# Altium PCB P003_LED_Strip.PcbDoc (part 2 of 2)
Units mil, origin at the board's own origin, x right, y up, seen from the top; angles counter-clockwise.
Board outline 19680 x 580 mil, 2 copper layers (Top Layer, Bottom Layer), stack 61.6 mil thick; 160 components, 143 nets, 416 pads, 60 vias.
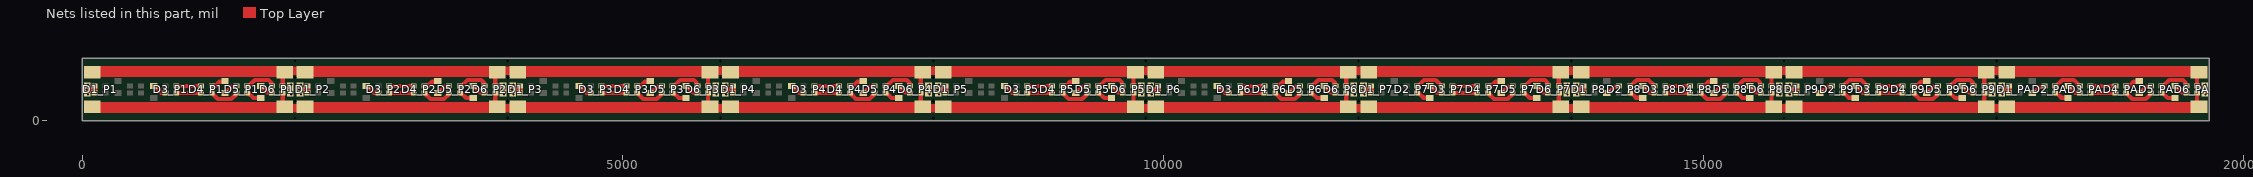
[diagram p2: the nets of this part, all layers, seen from the top]

## Via types
v1: diameter 34, hole 20, Top Layer to Bottom Layer, tented both sides, 60 vias

## Nets (pads, with @x,y where several pads share a name; then routed paths per layer and width w, separated by ;. In a path a pad name is that pad's centre, name@x,y a point inside that pad or via, vN(x,y) a via of type N, cw(c..) or ccw(c..) an arc to the next point about the centre after c; other vN are vias at no path point) (continued)
NetD2_P7_C1: D2_P7.C1 D3_P7.A1 | length 277.4
  Top Layer w40: D2_P7.C1@12349.5,322 12353.5,326 12362,326 12414,378 12522.5,378 12571,329.5 12571,326 12575,322 D3_P7.A1@12578.5,322
NetD2_P7_C2: D2_P7.C2 R3_P7.2 | length 140.9
  Top Layer w40: D2_P7.C2@12349.5,258 12353.5,254 12367,254 12406.07,214.93 12457.07,214.93 R3_P7.2@12468,204
NetD2_P8_A1: D2_P8.A1 R1_P8.1 | length 139.5
  Top Layer w40: R1_P8.1@14106,264 14126,264 14180,318 14217.5,318 D2_P8.A1@14221.5,322
NetD2_P8_C1: D2_P8.C1 D3_P8.A1 | length 277.4
  Top Layer w40: D2_P8.C1@14317.5,322 14321.5,326 14330,326 14382,378 14490.5,378 14539,329.5 14539,326 14543,322 D3_P8.A1@14546.5,322
NetD2_P8_C2: D2_P8.C2 R3_P8.2 | length 140.9
  Top Layer w40: D2_P8.C2@14317.5,258 14321.5,254 14335,254 14374.07,214.93 14425.07,214.93 R3_P8.2@14436,204
NetD2_P9_A1: D2_P9.A1 R1_P9.1 | length 139.5
  Top Layer w40: R1_P9.1@16074,264 16094,264 16148,318 16185.5,318 D2_P9.A1@16189.5,322
NetD2_P9_C1: D2_P9.C1 D3_P9.A1 | length 277.4
  Top Layer w40: D2_P9.C1@16285.5,322 16289.5,326 16298,326 16350,378 16458.5,378 16507,329.5 16507,326 16511,322 D3_P9.A1@16514.5,322
NetD2_P9_C2: D2_P9.C2 R3_P9.2 | length 140.9
  Top Layer w40: D2_P9.C2@16285.5,258 16289.5,254 16303,254 16342.07,214.93 16393.07,214.93 R3_P9.2@16404,204
NetD2_PA_A1: D2_PA.A1 R1_PA.1 | length 139.5
  Top Layer w40: R1_PA.1@18042,264 18062,264 18116,318 18153.5,318 D2_PA.A1@18157.5,322
NetD2_PA_C1: D2_PA.C1 D3_PA.A1 | length 277.4
  Top Layer w40: D2_PA.C1@18253.5,322 18257.5,326 18266,326 18318,378 18426.5,378 18475,329.5 18475,326 18479,322 D3_PA.A1@18482.5,322
NetD2_PA_C2: D2_PA.C2 R3_PA.2 | length 140.9
  Top Layer w40: D2_PA.C2@18253.5,258 18257.5,254 18271,254 18310.07,214.93 18361.07,214.93 R3_PA.2@18372,204
NetD3_P1_A2: D3_P1.A2 R3_P1.1 | length 120.5
  Top Layer w40: R3_P1.1@674,316 728.93,261.07 767.43,261.07 D3_P1.A2@770.5,258
NetD3_P1_C1: D3_P1.C1 D4_P1.A1 | length 229
  Top Layer w40: D3_P1.C1@869.5,322 D4_P1.A1@1098.5,322
NetD3_P1_C2: D3_P1.C2 D4_P1.A2 | length 229
  Top Layer w40: D3_P1.C2@869.5,258 D4_P1.A2@1098.5,258
NetD3_P2_A2: D3_P2.A2 R3_P2.1 | length 120.5
  Top Layer w40: R3_P2.1@2642,316 2696.93,261.07 2735.43,261.07 D3_P2.A2@2738.5,258
NetD3_P2_C1: D3_P2.C1 D4_P2.A1 | length 229
  Top Layer w40: D3_P2.C1@2837.5,322 D4_P2.A1@3066.5,322
NetD3_P2_C2: D3_P2.C2 D4_P2.A2 | length 229
  Top Layer w40: D3_P2.C2@2837.5,258 D4_P2.A2@3066.5,258
NetD3_P3_A2: D3_P3.A2 R3_P3.1 | length 120.5
  Top Layer w40: R3_P3.1@4610,316 4664.93,261.07 4703.43,261.07 D3_P3.A2@4706.5,258
NetD3_P3_C1: D3_P3.C1 D4_P3.A1 | length 229
  Top Layer w40: D3_P3.C1@4805.5,322 D4_P3.A1@5034.5,322
NetD3_P3_C2: D3_P3.C2 D4_P3.A2 | length 229
  Top Layer w40: D3_P3.C2@4805.5,258 D4_P3.A2@5034.5,258
NetD3_P4_A2: D3_P4.A2 R3_P4.1 | length 120.5
  Top Layer w40: R3_P4.1@6578,316 6632.93,261.07 6671.43,261.07 D3_P4.A2@6674.5,258
NetD3_P4_C1: D3_P4.C1 D4_P4.A1 | length 229
  Top Layer w40: D3_P4.C1@6773.5,322 D4_P4.A1@7002.5,322
NetD3_P4_C2: D3_P4.C2 D4_P4.A2 | length 229
  Top Layer w40: D3_P4.C2@6773.5,258 D4_P4.A2@7002.5,258
NetD3_P5_A2: D3_P5.A2 R3_P5.1 | length 120.5
  Top Layer w40: R3_P5.1@8546,316 8600.93,261.07 8639.43,261.07 D3_P5.A2@8642.5,258
NetD3_P5_C1: D3_P5.C1 D4_P5.A1 | length 229
  Top Layer w40: D3_P5.C1@8741.5,322 D4_P5.A1@8970.5,322
NetD3_P5_C2: D3_P5.C2 D4_P5.A2 | length 229
  Top Layer w40: D3_P5.C2@8741.5,258 D4_P5.A2@8970.5,258
NetD3_P6_A2: D3_P6.A2 R3_P6.1 | length 120.5
  Top Layer w40: R3_P6.1@10514,316 10568.93,261.07 10607.43,261.07 D3_P6.A2@10610.5,258
NetD3_P6_C1: D3_P6.C1 D4_P6.A1 | length 229
  Top Layer w40: D3_P6.C1@10709.5,322 D4_P6.A1@10938.5,322
NetD3_P6_C2: D3_P6.C2 D4_P6.A2 | length 229
  Top Layer w40: D3_P6.C2@10709.5,258 D4_P6.A2@10938.5,258
NetD3_P7_A2: D3_P7.A2 R3_P7.1 | length 120.5
  Top Layer w40: R3_P7.1@12482,316 12536.93,261.07 12575.43,261.07 D3_P7.A2@12578.5,258
NetD3_P7_C1: D3_P7.C1 D4_P7.A1 | length 229
  Top Layer w40: D3_P7.C1@12677.5,322 D4_P7.A1@12906.5,322
NetD3_P7_C2: D3_P7.C2 D4_P7.A2 | length 229
  Top Layer w40: D3_P7.C2@12677.5,258 D4_P7.A2@12906.5,258
NetD3_P8_A2: D3_P8.A2 R3_P8.1 | length 120.5
  Top Layer w40: R3_P8.1@14450,316 14504.93,261.07 14543.43,261.07 D3_P8.A2@14546.5,258
NetD3_P8_C1: D3_P8.C1 D4_P8.A1 | length 229
  Top Layer w40: D3_P8.C1@14645.5,322 D4_P8.A1@14874.5,322
NetD3_P8_C2: D3_P8.C2 D4_P8.A2 | length 229
  Top Layer w40: D3_P8.C2@14645.5,258 D4_P8.A2@14874.5,258
NetD3_P9_A2: D3_P9.A2 R3_P9.1 | length 120.5
  Top Layer w40: R3_P9.1@16418,316 16472.93,261.07 16511.43,261.07 D3_P9.A2@16514.5,258
NetD3_P9_C1: D3_P9.C1 D4_P9.A1 | length 229
  Top Layer w40: D3_P9.C1@16613.5,322 D4_P9.A1@16842.5,322
NetD3_P9_C2: D3_P9.C2 D4_P9.A2 | length 229
  Top Layer w40: D3_P9.C2@16613.5,258 D4_P9.A2@16842.5,258
NetD3_PA_A2: D3_PA.A2 R3_PA.1 | length 120.5
  Top Layer w40: R3_PA.1@18386,316 18440.93,261.07 18479.43,261.07 D3_PA.A2@18482.5,258
NetD3_PA_C1: D3_PA.C1 D4_PA.A1 | length 229
  Top Layer w40: D3_PA.C1@18581.5,322 D4_PA.A1@18810.5,322
NetD3_PA_C2: D3_PA.C2 D4_PA.A2 | length 229
  Top Layer w40: D3_PA.C2@18581.5,258 D4_PA.A2@18810.5,258
NetD4_P1_C1: D4_P1.C1 R2_P1.2 | length 134.3
  Top Layer w40: D4_P1.C1@1204.5,322 1204.5,325.5 1205,326 1233,326 1269,362 1306,362 R2_P1.2@1316,372
NetD4_P1_C2: D4_P1.C2 D5_P1.A2 | length 284.5
  Top Layer w40: D4_P1.C2@1197.5,258 1201,258 1205,254 1205,250.5 1253.5,202 1379,202 1419,242 1419,254 1423,258 D5_P1.A2@1426.5,258
NetD4_P2_C1: D4_P2.C1 R2_P2.2 | length 134.3
  Top Layer w40: D4_P2.C1@3172.5,322 3172.5,325.5 3173,326 3201,326 3237,362 3274,362 R2_P2.2@3284,372
NetD4_P2_C2: D4_P2.C2 D5_P2.A2 | length 284.5
  Top Layer w40: D4_P2.C2@3165.5,258 3169,258 3173,254 3173,250.5 3221.5,202 3347,202 3387,242 3387,254 3391,258 D5_P2.A2@3394.5,258
NetD4_P3_C1: D4_P3.C1 R2_P3.2 | length 134.3
  Top Layer w40: D4_P3.C1@5140.5,322 5140.5,325.5 5141,326 5169,326 5205,362 5242,362 R2_P3.2@5252,372
NetD4_P3_C2: D4_P3.C2 D5_P3.A2 | length 284.5
  Top Layer w40: D4_P3.C2@5133.5,258 5137,258 5141,254 5141,250.5 5189.5,202 5315,202 5355,242 5355,254 5359,258 D5_P3.A2@5362.5,258
NetD4_P4_C1: D4_P4.C1 R2_P4.2 | length 134.3
  Top Layer w40: D4_P4.C1@7108.5,322 7108.5,325.5 7109,326 7137,326 7173,362 7210,362 R2_P4.2@7220,372
NetD4_P4_C2: D4_P4.C2 D5_P4.A2 | length 284.5
  Top Layer w40: D4_P4.C2@7101.5,258 7105,258 7109,254 7109,250.5 7157.5,202 7283,202 7323,242 7323,254 7327,258 D5_P4.A2@7330.5,258
NetD4_P5_C1: D4_P5.C1 R2_P5.2 | length 134.3
  Top Layer w40: D4_P5.C1@9076.5,322 9076.5,325.5 9077,326 9105,326 9141,362 9178,362 R2_P5.2@9188,372
NetD4_P5_C2: D4_P5.C2 D5_P5.A2 | length 284.5
  Top Layer w40: D4_P5.C2@9069.5,258 9073,258 9077,254 9077,250.5 9125.5,202 9251,202 9291,242 9291,254 9295,258 D5_P5.A2@9298.5,258
NetD4_P6_C1: D4_P6.C1 R2_P6.2 | length 134.3
  Top Layer w40: D4_P6.C1@11044.5,322 11044.5,325.5 11045,326 11073,326 11109,362 11146,362 R2_P6.2@11156,372
NetD4_P6_C2: D4_P6.C2 D5_P6.A2 | length 284.5
  Top Layer w40: D4_P6.C2@11037.5,258 11041,258 11045,254 11045,250.5 11093.5,202 11219,202 11259,242 11259,254 11263,258 D5_P6.A2@11266.5,258
NetD4_P7_C1: D4_P7.C1 R2_P7.2 | length 134.3
  Top Layer w40: D4_P7.C1@13012.5,322 13012.5,325.5 13013,326 13041,326 13077,362 13114,362 R2_P7.2@13124,372
NetD4_P7_C2: D4_P7.C2 D5_P7.A2 | length 284.5
  Top Layer w40: D4_P7.C2@13005.5,258 13009,258 13013,254 13013,250.5 13061.5,202 13187,202 13227,242 13227,254 13231,258 D5_P7.A2@13234.5,258
NetD4_P8_C1: D4_P8.C1 R2_P8.2 | length 134.3
  Top Layer w40: D4_P8.C1@14980.5,322 14980.5,325.5 14981,326 15009,326 15045,362 15082,362 R2_P8.2@15092,372
NetD4_P8_C2: D4_P8.C2 D5_P8.A2 | length 284.5
  Top Layer w40: D4_P8.C2@14973.5,258 14977,258 14981,254 14981,250.5 15029.5,202 15155,202 15195,242 15195,254 15199,258 D5_P8.A2@15202.5,258
NetD4_P9_C1: D4_P9.C1 R2_P9.2 | length 134.3
  Top Layer w40: D4_P9.C1@16948.5,322 16948.5,325.5 16949,326 16977,326 17013,362 17050,362 R2_P9.2@17060,372
NetD4_P9_C2: D4_P9.C2 D5_P9.A2 | length 284.5
  Top Layer w40: D4_P9.C2@16941.5,258 16945,258 16949,254 16949,250.5 16997.5,202 17123,202 17163,242 17163,254 17167,258 D5_P9.A2@17170.5,258
NetD4_PA_C1: D4_PA.C1 R2_PA.2 | length 134.3
  Top Layer w40: D4_PA.C1@18916.5,322 18916.5,325.5 18917,326 18945,326 18981,362 19018,362 R2_PA.2@19028,372
NetD4_PA_C2: D4_PA.C2 D5_PA.A2 | length 284.5
  Top Layer w40: D4_PA.C2@18909.5,258 18913,258 18917,254 18917,250.5 18965.5,202 19091,202 19131,242 19131,254 19135,258 D5_PA.A2@19138.5,258
NetD5_P1_A1: D5_P1.A1 R2_P1.1 | length 124.5
  Top Layer w40: R2_P1.1@1329,264 1334,264 1334,269 1383,318 1422.5,318 D5_P1.A1@1426.5,322
NetD5_P1_C1: D5_P1.C1 D6_P1.A1 | length 299.6
  Top Layer w40: D5_P1.C1@1525.5,322 1529.5,326 1544,326 1596,378 1723.57,378 1747,354.57 1747,326 1751,322 D6_P1.A1@1762,322
NetD5_P1_C2: D5_P1.C2 R4_P1.2 | length 146.9
  Top Layer w40: D5_P1.C2@1525.5,258 1529.5,254 1540,254 1583.57,210.43 1643.57,210.43 R4_P1.2@1650,204
NetD5_P2_A1: D5_P2.A1 R2_P2.1 | length 124.5
  Top Layer w40: R2_P2.1@3297,264 3302,264 3302,269 3351,318 3390.5,318 D5_P2.A1@3394.5,322
NetD5_P2_C1: D5_P2.C1 D6_P2.A1 | length 299.6
  Top Layer w40: D5_P2.C1@3493.5,322 3497.5,326 3512,326 3564,378 3691.57,378 3715,354.57 3715,326 3719,322 D6_P2.A1@3730,322
NetD5_P2_C2: D5_P2.C2 R4_P2.2 | length 146.9
  Top Layer w40: D5_P2.C2@3493.5,258 3497.5,254 3508,254 3551.57,210.43 3611.57,210.43 R4_P2.2@3618,204
NetD5_P3_A1: D5_P3.A1 R2_P3.1 | length 124.5
  Top Layer w40: R2_P3.1@5265,264 5270,264 5270,269 5319,318 5358.5,318 D5_P3.A1@5362.5,322
NetD5_P3_C1: D5_P3.C1 D6_P3.A1 | length 299.6
  Top Layer w40: D5_P3.C1@5461.5,322 5465.5,326 5480,326 5532,378 5659.57,378 5683,354.57 5683,326 5687,322 D6_P3.A1@5698,322
NetD5_P3_C2: D5_P3.C2 R4_P3.2 | length 146.9
  Top Layer w40: D5_P3.C2@5461.5,258 5465.5,254 5476,254 5519.57,210.43 5579.57,210.43 R4_P3.2@5586,204
NetD5_P4_A1: D5_P4.A1 R2_P4.1 | length 124.5
  Top Layer w40: R2_P4.1@7233,264 7238,264 7238,269 7287,318 7326.5,318 D5_P4.A1@7330.5,322
NetD5_P4_C1: D5_P4.C1 D6_P4.A1 | length 299.6
  Top Layer w40: D5_P4.C1@7429.5,322 7433.5,326 7448,326 7500,378 7627.57,378 7651,354.57 7651,326 7655,322 D6_P4.A1@7666,322
NetD5_P4_C2: D5_P4.C2 R4_P4.2 | length 146.9
  Top Layer w40: D5_P4.C2@7429.5,258 7433.5,254 7444,254 7487.57,210.43 7547.57,210.43 R4_P4.2@7554,204
NetD5_P5_A1: D5_P5.A1 R2_P5.1 | length 124.5
  Top Layer w40: R2_P5.1@9201,264 9206,264 9206,269 9255,318 9294.5,318 D5_P5.A1@9298.5,322
NetD5_P5_C1: D5_P5.C1 D6_P5.A1 | length 299.6
  Top Layer w40: D5_P5.C1@9397.5,322 9401.5,326 9416,326 9468,378 9595.57,378 9619,354.57 9619,326 9623,322 D6_P5.A1@9634,322
NetD5_P5_C2: D5_P5.C2 R4_P5.2 | length 146.9
  Top Layer w40: D5_P5.C2@9397.5,258 9401.5,254 9412,254 9455.57,210.43 9515.57,210.43 R4_P5.2@9522,204
NetD5_P6_A1: D5_P6.A1 R2_P6.1 | length 124.5
  Top Layer w40: R2_P6.1@11169,264 11174,264 11174,269 11223,318 11262.5,318 D5_P6.A1@11266.5,322
NetD5_P6_C1: D5_P6.C1 D6_P6.A1 | length 299.6
  Top Layer w40: D5_P6.C1@11365.5,322 11369.5,326 11384,326 11436,378 11563.57,378 11587,354.57 11587,326 11591,322 D6_P6.A1@11602,322
NetD5_P6_C2: D5_P6.C2 R4_P6.2 | length 146.9
  Top Layer w40: D5_P6.C2@11365.5,258 11369.5,254 11380,254 11423.57,210.43 11483.57,210.43 R4_P6.2@11490,204
NetD5_P7_A1: D5_P7.A1 R2_P7.1 | length 124.5
  Top Layer w40: R2_P7.1@13137,264 13142,264 13142,269 13191,318 13230.5,318 D5_P7.A1@13234.5,322
NetD5_P7_C1: D5_P7.C1 D6_P7.A1 | length 299.6
  Top Layer w40: D5_P7.C1@13333.5,322 13337.5,326 13352,326 13404,378 13531.57,378 13555,354.57 13555,326 13559,322 D6_P7.A1@13570,322
NetD5_P7_C2: D5_P7.C2 R4_P7.2 | length 146.9
  Top Layer w40: D5_P7.C2@13333.5,258 13337.5,254 13348,254 13391.57,210.43 13451.57,210.43 R4_P7.2@13458,204
NetD5_P8_A1: D5_P8.A1 R2_P8.1 | length 124.5
  Top Layer w40: R2_P8.1@15105,264 15110,264 15110,269 15159,318 15198.5,318 D5_P8.A1@15202.5,322
NetD5_P8_C1: D5_P8.C1 D6_P8.A1 | length 299.6
  Top Layer w40: D5_P8.C1@15301.5,322 15305.5,326 15320,326 15372,378 15499.57,378 15523,354.57 15523,326 15527,322 D6_P8.A1@15538,322
NetD5_P8_C2: D5_P8.C2 R4_P8.2 | length 146.9
  Top Layer w40: D5_P8.C2@15301.5,258 15305.5,254 15316,254 15359.57,210.43 15419.57,210.43 R4_P8.2@15426,204
NetD5_P9_A1: D5_P9.A1 R2_P9.1 | length 124.5
  Top Layer w40: R2_P9.1@17073,264 17078,264 17078,269 17127,318 17166.5,318 D5_P9.A1@17170.5,322
NetD5_P9_C1: D5_P9.C1 D6_P9.A1 | length 299.6
  Top Layer w40: D5_P9.C1@17269.5,322 17273.5,326 17288,326 17340,378 17467.57,378 17491,354.57 17491,326 17495,322 D6_P9.A1@17506,322
NetD5_P9_C2: D5_P9.C2 R4_P9.2 | length 146.9
  Top Layer w40: D5_P9.C2@17269.5,258 17273.5,254 17284,254 17327.57,210.43 17387.57,210.43 R4_P9.2@17394,204
NetD5_PA_A1: D5_PA.A1 R2_PA.1 | length 124.5
  Top Layer w40: R2_PA.1@19041,264 19046,264 19046,269 19095,318 19134.5,318 D5_PA.A1@19138.5,322
NetD5_PA_C1: D5_PA.C1 D6_PA.A1 | length 299.6
  Top Layer w40: D5_PA.C1@19237.5,322 19241.5,326 19256,326 19308,378 19435.57,378 19459,354.57 19459,326 19463,322 D6_PA.A1@19474,322
NetD5_PA_C2: D5_PA.C2 R4_PA.2 | length 146.9
  Top Layer w40: D5_PA.C2@19237.5,258 19241.5,254 19252,254 19295.57,210.43 19355.57,210.43 R4_PA.2@19362,204
NetD6_P1_A2: D6_P1.A2 R4_P1.1 | length 140.9
  Top Layer w40: R4_P1.1@1650,323 1657,323 1664,316 1664,309 1711,262 D6_P1.A2@1761.5,262
NetD6_P2_A2: D6_P2.A2 R4_P2.1 | length 140.9
  Top Layer w40: R4_P2.1@3618,323 3625,323 3632,316 3632,309 3679,262 D6_P2.A2@3729.5,262
NetD6_P3_A2: D6_P3.A2 R4_P3.1 | length 140.9
  Top Layer w40: R4_P3.1@5586,323 5593,323 5600,316 5600,309 5647,262 D6_P3.A2@5697.5,262
NetD6_P4_A2: D6_P4.A2 R4_P4.1 | length 140.9
  Top Layer w40: R4_P4.1@7554,323 7561,323 7568,316 7568,309 7615,262 D6_P4.A2@7665.5,262
NetD6_P5_A2: D6_P5.A2 R4_P5.1 | length 140.9
  Top Layer w40: R4_P5.1@9522,323 9529,323 9536,316 9536,309 9583,262 D6_P5.A2@9633.5,262
NetD6_P6_A2: D6_P6.A2 R4_P6.1 | length 140.9
  Top Layer w40: R4_P6.1@11490,323 11497,323 11504,316 11504,309 11551,262 D6_P6.A2@11601.5,262
NetD6_P7_A2: D6_P7.A2 R4_P7.1 | length 140.9
  Top Layer w40: R4_P7.1@13458,323 13465,323 13472,316 13472,309 13519,262 D6_P7.A2@13569.5,262
NetD6_P8_A2: D6_P8.A2 R4_P8.1 | length 140.9
  Top Layer w40: R4_P8.1@15426,323 15433,323 15440,316 15440,309 15487,262 D6_P8.A2@15537.5,262
NetD6_P9_A2: D6_P9.A2 R4_P9.1 | length 140.9
  Top Layer w40: R4_P9.1@17394,323 17401,323 17408,316 17408,309 17455,262 D6_P9.A2@17505.5,262
NetD6_PA_A2: D6_PA.A2 R4_PA.1 | length 140.9
  Top Layer w40: R4_PA.1@19362,323 19369,323 19376,316 19376,309 19423,262 D6_PA.A2@19473.5,262
NW1_In_P1: D6_P1.C1 D6_P2.C1 D6_P3.C1 D6_P4.C1 D6_P5.C1 D6_P6.C1 D6_P7.C1 D6_P8.C1 D6_P9.C1 D6_PA.C1 TP1_P1.1 TP1_P2.1 TP1_P3.1 TP1_P4.1 TP1_P5.1 TP1_P6.1 TP1_P7.1 TP1_P8.1 TP1_P9.1 TP1_PA.1 TP2_P1.1 TP2_P2.1 TP2_P3.1 TP2_P4.1 TP2_P5.1 TP2_P6.1 TP2_P7.1 TP2_P8.1 TP2_P9.1 TP2_PA.1 | length 20905
  Top Layer w40: D6_P1.C1@1853.5,322 1853.5,413.5 TP2_P1.1@1903,463 ; D6_P2.C1@3821.5,322 3821.5,413.5 TP2_P2.1@3871,463 ; D6_P3.C1@5789.5,322 5789.5,413.5 TP2_P3.1@5839,463 ; D6_P4.C1@7757.5,322 7757.5,413.5 TP2_P4.1@7807,463 ; D6_P5.C1@9725.5,322 9725.5,413.5 TP2_P5.1@9775,463 ; D6_P6.C1@11693.5,322 11693.5,413.5 TP2_P6.1@11743,463 ; D6_P7.C1@13661.5,322 13661.5,413.5 TP2_P7.1@13711,463 ; D6_P8.C1@15629.5,322 15629.5,413.5 TP2_P8.1@15679,463 ; D6_P9.C1@17597.5,322 17597.5,413.5 TP2_P9.1@17647,463 ; D6_PA.C1@19565.5,322 19565.5,413.5 TP2_PA.1@19615,463
  Top Layer w80: TP2_P1.1@1883,463 TP1_P2.1@2053,463 ; TP2_P2.1@3853,463 TP1_P3.1@4023,463 ; TP2_P3.1@5823,463 TP1_P4.1@5993,463 ; TP2_P4.1@7783,463 TP1_P5.1@7953,463 ; TP2_P5.1@9753,463 TP1_P6.1@9923,463 ; TP2_P6.1@11723,463 TP1_P7.1@11893,463 ; TP2_P7.1@13692,463 TP1_P8.1@13862,463 ; TP2_P8.1@15657,463 TP1_P9.1@15827,463 ; TP2_P9.1@17625,463 TP1_PA.1@17795,463
  Top Layer w100: TP1_P1.1@100,457 TP2_P1.1@1876,457 ; TP1_P2.1@2068,457 TP2_P2.1@3844,457 ; TP1_P3.1@4036,457 TP2_P3.1@5812,457 ; TP1_P4.1@6004,457 TP2_P4.1@7780,457 ; TP1_P5.1@7972,457 TP2_P5.1@9748,457 ; TP1_P6.1@9940,457 TP2_P6.1@11716,457 ; TP1_P7.1@11908,457 TP2_P7.1@13684,457 ; TP1_P8.1@13876,457 TP2_P8.1@15652,457 ; TP1_P9.1@15844,457 TP2_P9.1@17620,457 ; TP1_PA.1@17812,457 TP2_PA.1@19588,457
NW2_In_P1: D6_P1.C2 D6_P2.C2 D6_P3.C2 D6_P4.C2 D6_P5.C2 D6_P6.C2 D6_P7.C2 D6_P8.C2 D6_P9.C2 D6_PA.C2 TP5_P1.1 TP5_P2.1 TP5_P3.1 TP5_P4.1 TP5_P5.1 TP5_P6.1 TP5_P7.1 TP5_P8.1 TP5_P9.1 TP5_PA.1 TP6_P1.1 TP6_P2.1 TP6_P3.1 TP6_P4.1 TP6_P5.1 TP6_P6.1 TP6_P7.1 TP6_P8.1 TP6_P9.1 TP6_PA.1 | length 20646.6
  Top Layer w40: D6_P1.C2@1853.5,258 1853.5,148.5 TP6_P1.1@1872,130 ; D6_P2.C2@3821.5,258 3821.5,148.5 TP6_P2.1@3840,130 ; D6_P3.C2@5789.5,258 5789.5,148.5 TP6_P3.1@5808,130 ; D6_P4.C2@7757.5,258 7757.5,148.5 TP6_P4.1@7776,130 ; D6_P5.C2@9725.5,258 9725.5,148.5 TP6_P5.1@9744,130 ; D6_P6.C2@11693.5,258 11693.5,148.5 TP6_P6.1@11712,130 ; D6_P7.C2@13661.5,258 13661.5,148.5 TP6_P7.1@13680,130 ; D6_P8.C2@15629.5,258 15629.5,148.5 TP6_P8.1@15648,130 ; D6_P9.C2@17597.5,258 17597.5,148.5 TP6_P9.1@17616,130 ; D6_PA.C2@19565.5,258 19565.5,148.5 TP6_PA.1@19584,130
  Top Layer w80: TP6_P1.1@1883,117 TP5_P2.1@2053,117 ; TP6_P2.1@3853,117 TP5_P3.1@4023,117 ; TP6_P3.1@5823,117 TP5_P4.1@5993,117 ; TP6_P4.1@7783,117 TP5_P5.1@7953,117 ; TP6_P5.1@9753,117 TP5_P6.1@9923,117 ; TP6_P6.1@11723,117 TP5_P7.1@11893,117 ; TP6_P7.1@13692,117 TP5_P8.1@13862,117 ; TP6_P8.1@15657,117 TP5_P9.1@15827,117 ; TP6_P9.1@17625,117 TP5_PA.1@17795,117
  Top Layer w100: TP5_P1.1@100,123 TP6_P1.1@1876,123 ; TP5_P2.1@2068,123 TP6_P2.1@3844,123 ; TP5_P3.1@4036,123 TP6_P3.1@5812,123 ; TP5_P4.1@6004,123 TP6_P4.1@7780,123 ; TP5_P5.1@7972,123 TP6_P5.1@9748,123 ; TP5_P6.1@9940,123 TP6_P6.1@11716,123 ; TP5_P7.1@11908,123 TP6_P7.1@13684,123 ; TP5_P8.1@13876,123 TP6_P8.1@15652,123 ; TP5_P9.1@15844,123 TP6_P9.1@17620,123 ; TP5_PA.1@17812,123 TP6_PA.1@19588,123
PWR_In_P1: D1_P1.A1 D1_P1.A2 D1_P2.A1 D1_P2.A2 D1_P3.A1 D1_P3.A2 D1_P4.A1 D1_P4.A2 D1_P5.A1 D1_P5.A2 D1_P6.A1 D1_P6.A2 D1_P7.A1 D1_P7.A2 D1_P8.A1 D1_P8.A2 D1_P9.A1 D1_P9.A2 D1_PA.A1 D1_PA.A2 TP3_P1.1 TP3_P2.1 TP3_P3.1 TP3_P4.1 TP3_P5.1 TP3_P6.1 TP3_P7.1 TP3_P8.1 TP3_P9.1 TP3_PA.1 TP4_P1.1 TP4_P2.1 TP4_P3.1 TP4_P4.1 TP4_P5.1 TP4_P6.1 TP4_P7.1 TP4_P8.1 TP4_P9.1 TP4_PA.1 | length 1290
  Top Layer w40: D1_P1.A2@113.5,258 D1_P1.A1@113.5,322 ; D1_P2.A2@2081.5,258 D1_P2.A1@2081.5,322 ; D1_P3.A2@4049.5,258 D1_P3.A1@4049.5,322 ; D1_P4.A2@6017.5,258 D1_P4.A1@6017.5,322 ; D1_P5.A2@7985.5,258 D1_P5.A1@7985.5,322 ; D1_P6.A2@9953.5,258 D1_P6.A1@9953.5,322 ; D1_P7.A2@11921.5,258 D1_P7.A1@11921.5,322 ; D1_P8.A2@13889.5,258 D1_P8.A1@13889.5,322 ; D1_P9.A2@15857.5,258 D1_P9.A1@15857.5,322 ; D1_PA.A2@17825.5,258 D1_PA.A1@17825.5,322
  Top Layer w50: TP3_P1.1@52,289 117,289 ; TP3_P2.1@2020,289 2085,289 ; TP3_P3.1@3988,289 4053,289 ; TP3_P4.1@5956,289 6021,289 ; TP3_P5.1@7924,289 7989,289 ; TP3_P6.1@9892,289 9957,289 ; TP3_P7.1@11860,289 11925,289 ; TP3_P8.1@13828,289 13893,289 ; TP3_P9.1@15796,289 15861,289 ; TP3_PA.1@17764,289 17829,289
  other v1: 54,243 1933,243 2022,243 3901,243 3990,243 5869,243 5958,243 7837,243 7926,243 9805,243 9894,243 11773,243 11862,243 13741,243 13830,243 15709,243 15798,243 17677,243 17766,243 19645,243 38,289 1917,289 2006,289 3885,289 3974,289 5853,289 5942,289 7821,289 7910,289 9789,289 9878,289 11757,289 11846,289 13725,289 13814,289 15693,289 15782,289 17661,289 17750,289 19629,289 54,335 1933,335 2022,335 3901,335 3990,335 5869,335 5958,335 7837,335 7926,335 9805,335 9894,335 11773,335 11862,335 13741,335 13830,335 15709,335 15798,335 17677,335 17766,335 19645,335

## Other copper
Top Layer:
  rectangle net PWR_In_P1: 17640,229 17787,350
  rectangle net PWR_In_P1: 15675,229 15818,350
  rectangle net PWR_In_P1: 13705,229 13849,350
  rectangle net PWR_In_P1: 11737,229 11882,350
  rectangle net PWR_In_P1: 7801,229 7946,350
  rectangle net PWR_In_P1: 5835,229 5976,350
  rectangle net PWR_In_P1: 9769,229 9914,350
  rectangle net PWR_In_P1: 3865,229 4010,350
  rectangle net PWR_In_P1: 1898,229 2041,350
Bottom Layer:
  rectangle net PWR_In_P1: 20,199 19668,379

## Silkscreen, mask and mechanical layers (free items; w line width, h text height)
Top Overlay:
  lines w12: 193,494 220,494 ; 195,84 222,84 ; 2173,494 2200,494 ; 2175,84 2202,84 ; 4129,494 4156,494 ; 4131,84 4158,84 ; 6097,494 6124,494 ; 6099,84 6126,84 ; 8065,494 8092,494 ; 8067,84 8094,84 ; 10033,494 10060,494 ; 10035,84 10062,84 ; 12001,494 12028,494 ; 12003,84 12030,84 ; 13969,494 13996,494 ; 13971,84 13998,84 ; 15937,494 15964,494 ; 15939,84 15966,84 ; 17905,494 17932,494 ; 17907,84 17934,84
  text ".Print_Date" at 491,465 h50
  text ".PN_Prj" at 775,465 h50
  text ".Print_Date" at 2471,465 h50
  text ".PN_Prj" at 2755,465 h50
  text ".Print_Date" at 4427,465 h50
  text ".PN_Prj" at 4711,465 h50
  text ".Print_Date" at 6395,465 h50
  text ".PN_Prj" at 6679,465 h50
  text ".Print_Date" at 8363,465 h50
  text ".PN_Prj" at 8647,465 h50
  text ".Print_Date" at 10331,465 h50
  text ".PN_Prj" at 10615,465 h50
  text ".Print_Date" at 12299,465 h50
  text ".PN_Prj" at 12583,465 h50
  text ".Print_Date" at 14267,465 h50
  text ".PN_Prj" at 14551,465 h50
  text ".Print_Date" at 16235,465 h50
  text ".PN_Prj" at 16519,465 h50
  text ".Print_Date" at 18203,465 h50
  text ".PN_Prj" at 18487,465 h50
  text "G" at 240,462.17 h100
  text "G" at 2220,462.17 h100
  text "G" at 4176,462.17 h100
  text "G" at 6144,462.17 h100
  text "G" at 8112,462.17 h100
  text "G" at 10080,462.17 h100
  text "G" at 12048,462.17 h100
  text "G" at 14016,462.17 h100
  text "G" at 15984,462.17 h100
  text "G" at 17952,462.17 h100
  text "+" at 16,353.5 h60
  text "+" at 1996,353.5 h60
  text "+" at 3952,353.5 h60
  text "+" at 5920,353.5 h60
  text "+" at 7888,353.5 h60
  text "+" at 9856,353.5 h60
  text "+" at 11824,353.5 h60
  text "+" at 13792,353.5 h60
  text "+" at 15760,353.5 h60
  text "+" at 17728,353.5 h60
  text "+" at 16,186.5 h60
  text "+" at 1996,186.5 h60
  text "+" at 3952,186.5 h60
  text "+" at 5920,186.5 h60
  text "+" at 7888,186.5 h60
  text "+" at 9856,186.5 h60
  text "+" at 11824,186.5 h60
  text "+" at 13792,186.5 h60
  text "+" at 15760,186.5 h60
  text "+" at 17728,186.5 h60
  text ".Title_Prj" at 487,78 h40
  text ".Title_Prj" at 2467,78 h40
  text ".Title_Prj" at 4423,78 h40
  text ".Title_Prj" at 6391,78 h40
  text ".Title_Prj" at 8359,78 h40
  text ".Title_Prj" at 10327,78 h40
  text ".Title_Prj" at 12295,78 h40
  text ".Title_Prj" at 14263,78 h40
  text ".Title_Prj" at 16231,78 h40
  text ".Title_Prj" at 18199,78 h40
  text "REL.Rev_Prj" at 841,73 h50
  text "REL.Rev_Prj" at 2821,73 h50
  text "REL.Rev_Prj" at 4777,73 h50
  text "REL.Rev_Prj" at 6745,73 h50
  text "REL.Rev_Prj" at 8713,73 h50
  text "REL.Rev_Prj" at 10681,73 h50
  text "REL.Rev_Prj" at 12649,73 h50
  text "REL.Rev_Prj" at 14617,73 h50
  text "REL.Rev_Prj" at 16585,73 h50
  text "REL.Rev_Prj" at 18553,73 h50
  text "B" at 240,54 h100
  text "B" at 2220,54 h100
  text "B" at 4176,54 h100
  text "B" at 6144,54 h100
  text "B" at 8112,54 h100
  text "B" at 10080,54 h100
  text "B" at 12048,54 h100
  text "B" at 14016,54 h100
  text "B" at 15984,54 h100
  text "B" at 17952,54 h100
Mechanical 1:
  the board outline again, w4
Mechanical 5:
  lines w4: 1968,0 0,0 0,580 1968,580 ; 1968,0 1968,580 ; 1968,0 3936,0 ; 1968,0 1968,580 ; 1968,580 3936,580 ; 3936,0 5904,0 ; 3936,0 3936,580 ; 3936,0 3936,580 ; 3936,580 5904,580 ; 5904,0 7872,0 ; 5904,0 5904,580 ; 5904,0 5904,580 ; 5904,580 7872,580 ; 7872,0 9840,0 ; 7872,0 7872,580 ; 7872,0 7872,580 ; 7872,580 9840,580 ; 9840,0 9840,580 ; 9840,0 11808,0 ; 9840,0 9840,580 ; 9840,580 11808,580 ; 11808,0 13776,0 ; 11808,0 11808,580 ; 11808,0 11808,580 ; 11808,580 13776,580 ; 13776,0 15744,0 ; 13776,0 13776,580 ; 13776,0 13776,580 ; 13776,580 15744,580 ; 15744,0 15744,580 ; 15744,0 17712,0 ; 15744,0 15744,580 ; 15744,580 17712,580 ; 17712,0 17712,580 ; 17712,0 19680,0 19680,580 17712,580 ; 17712,0 17712,580
Mechanical 15:
  lines w4: -20,0 20,0 ; 0,-20 0,20